# Altium PCB 心形流水灯.PcbDoc
Units mm, origin at the board's own origin, x right, y up, seen from the top; angles counter-clockwise.
Board outline 85 x 75 mm, 2 copper layers (Top Layer, Bottom Layer); 72 components, 70 nets, 187 pads, 0 vias.
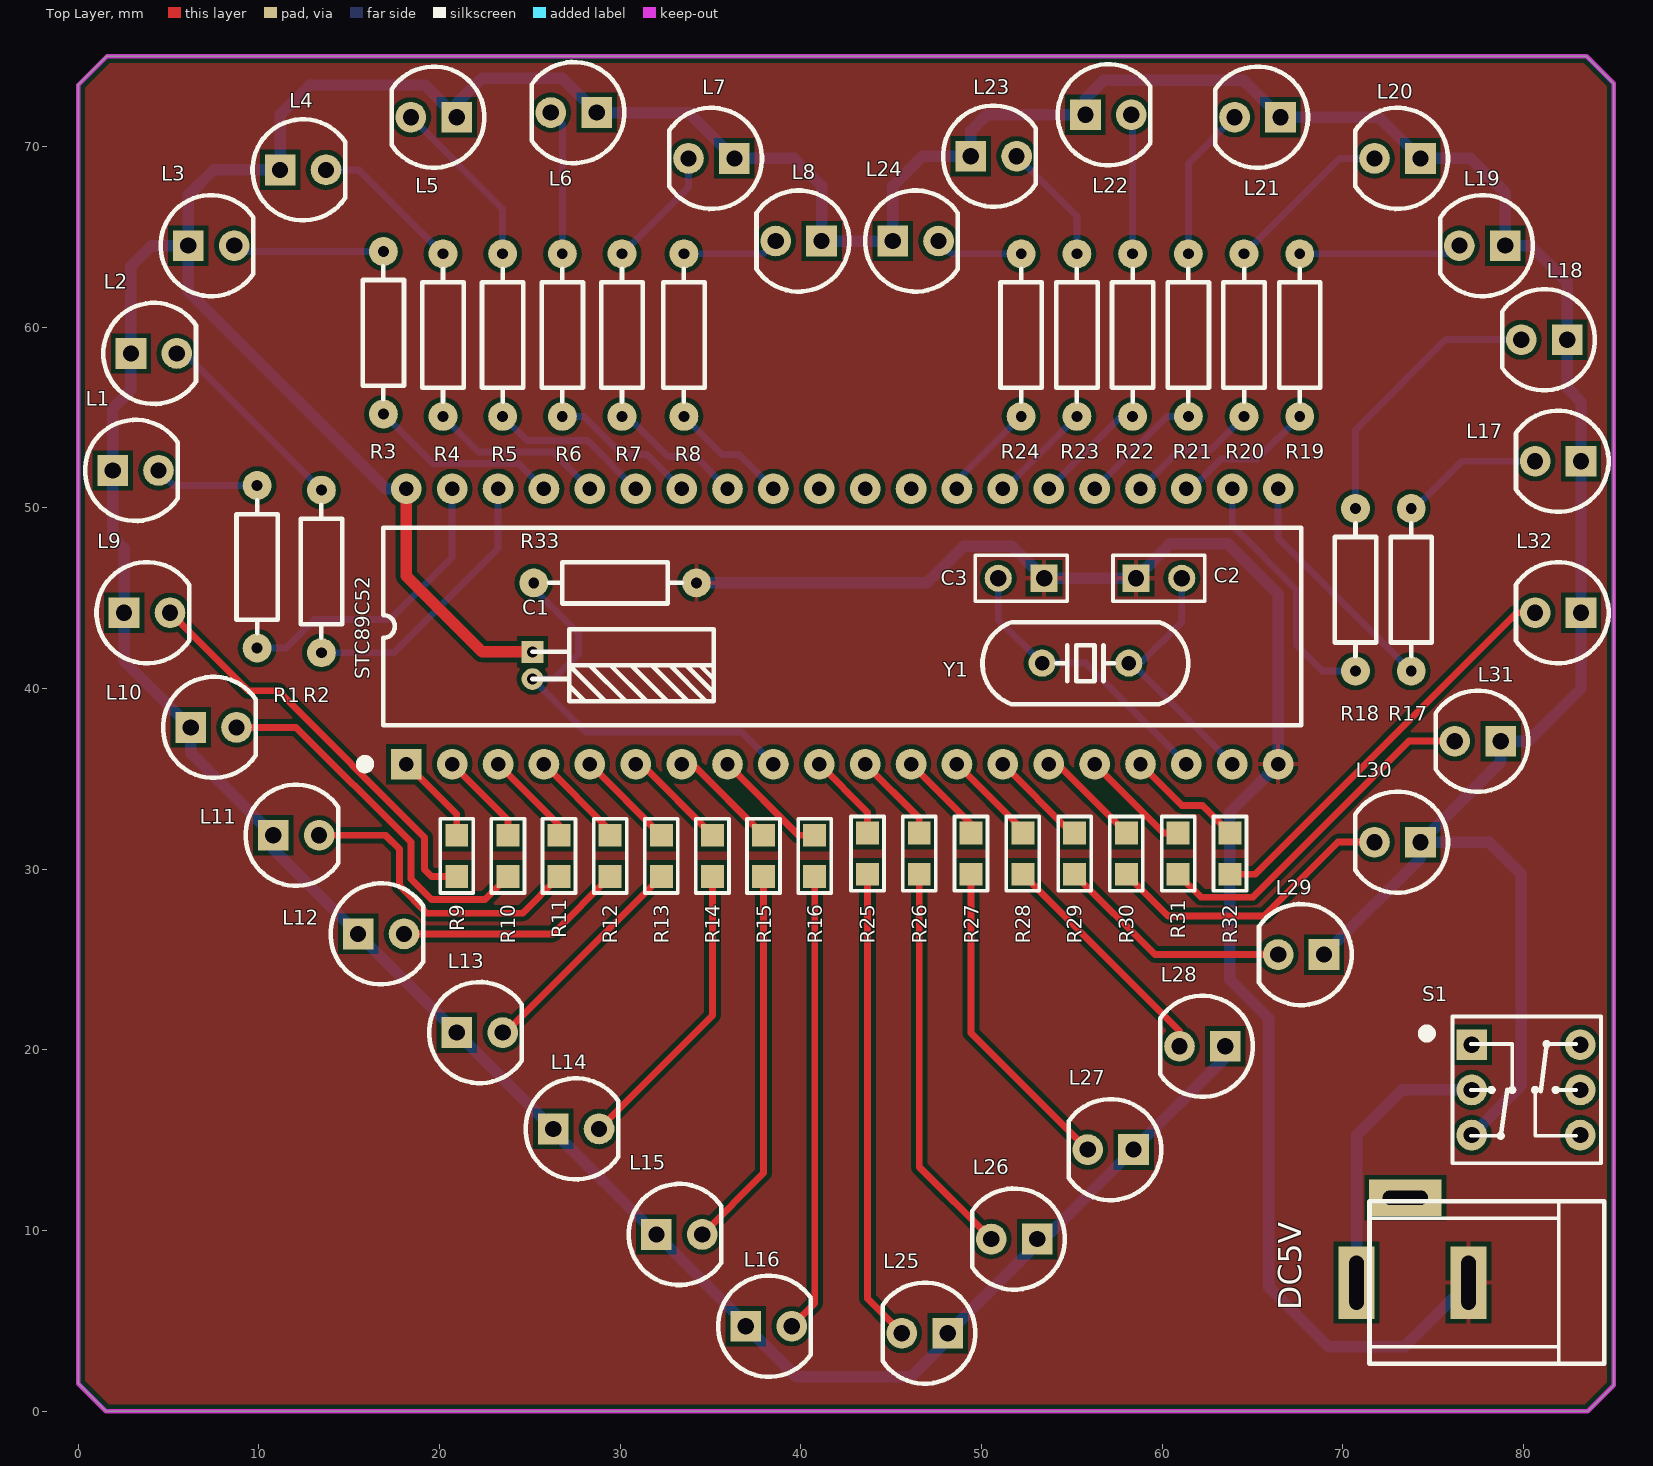
[diagram p0: Top Layer view]
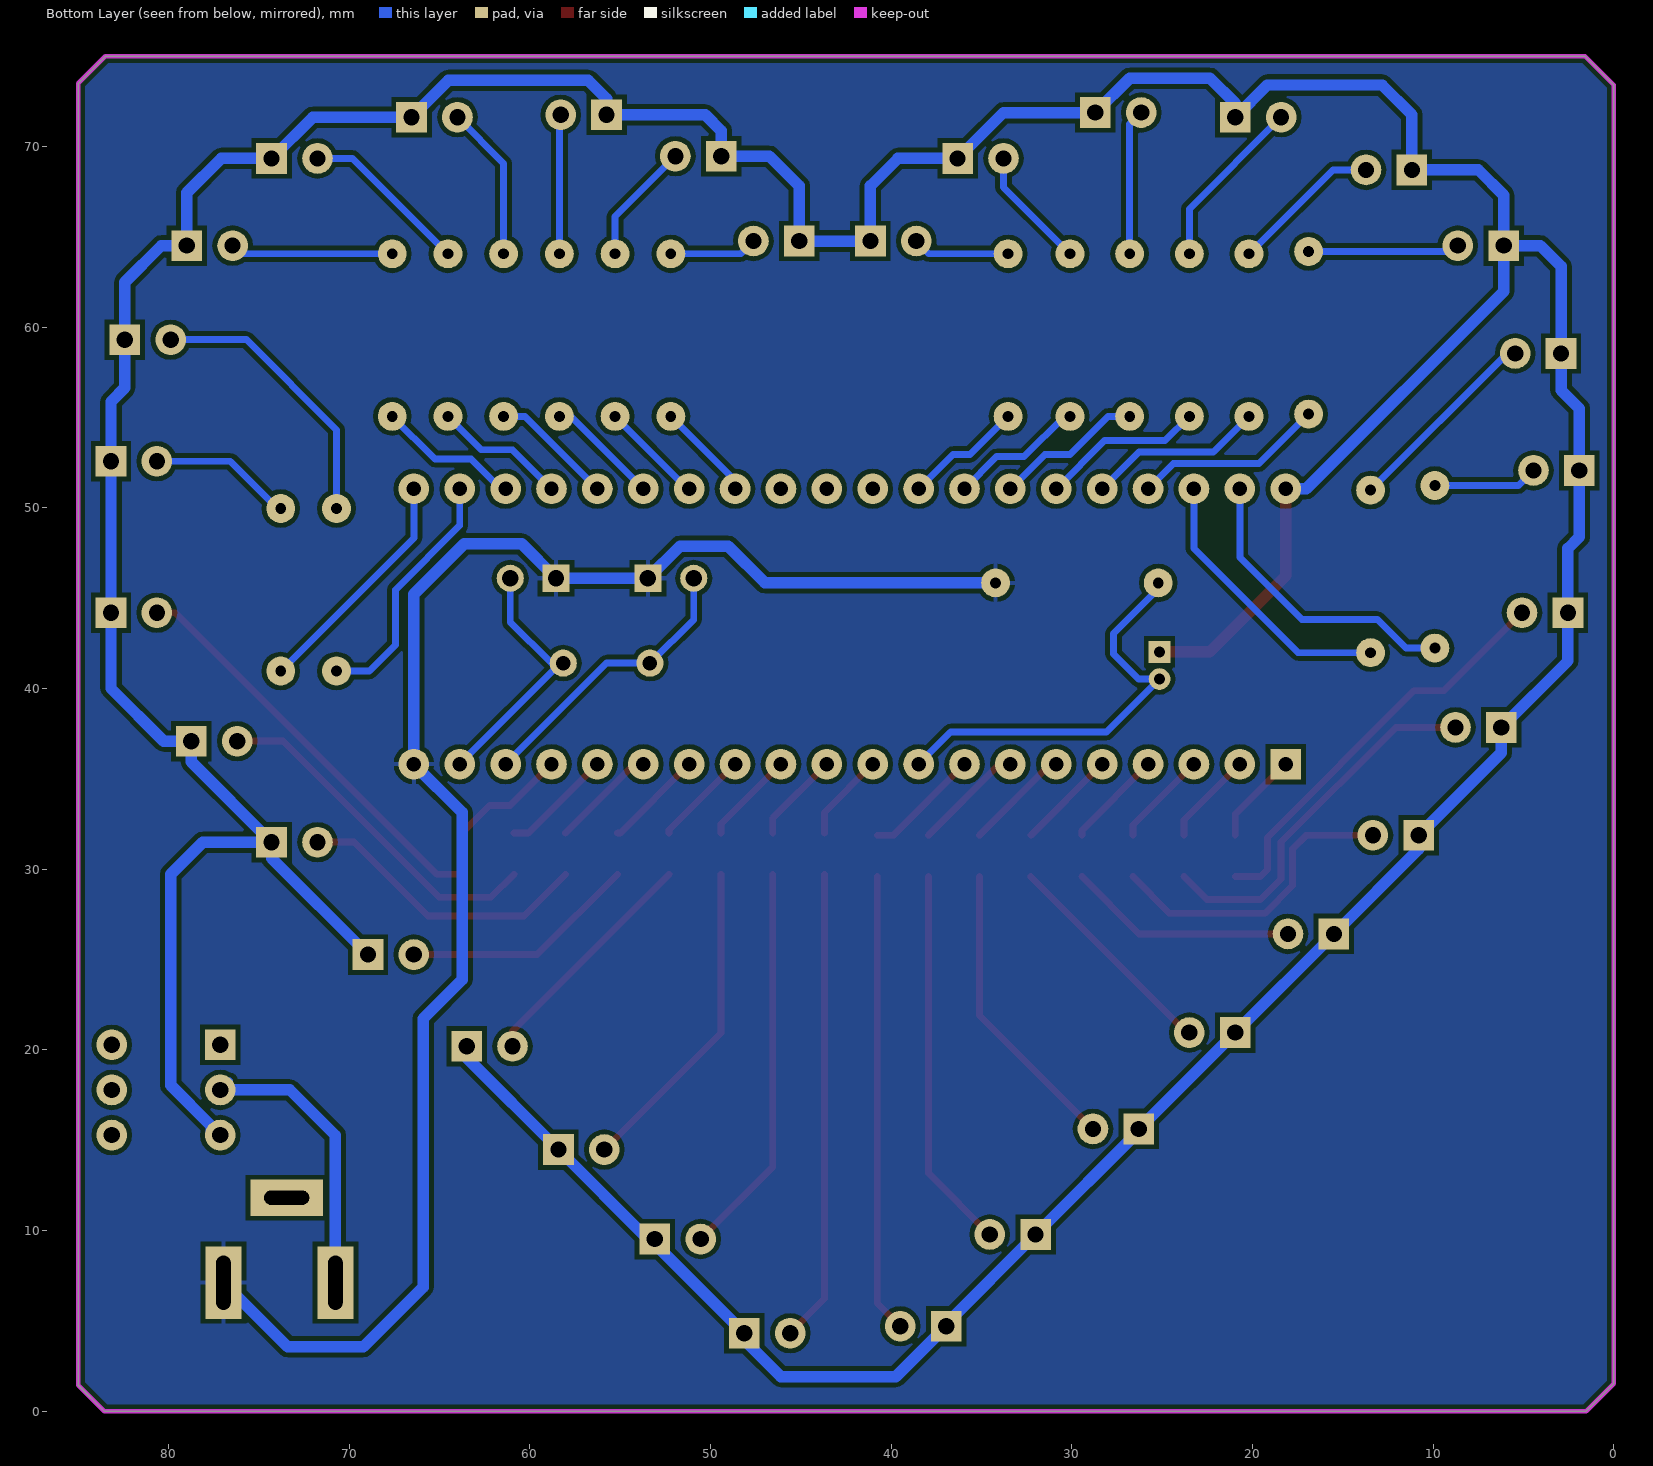
[diagram p1: Bottom Layer view, seen from below]
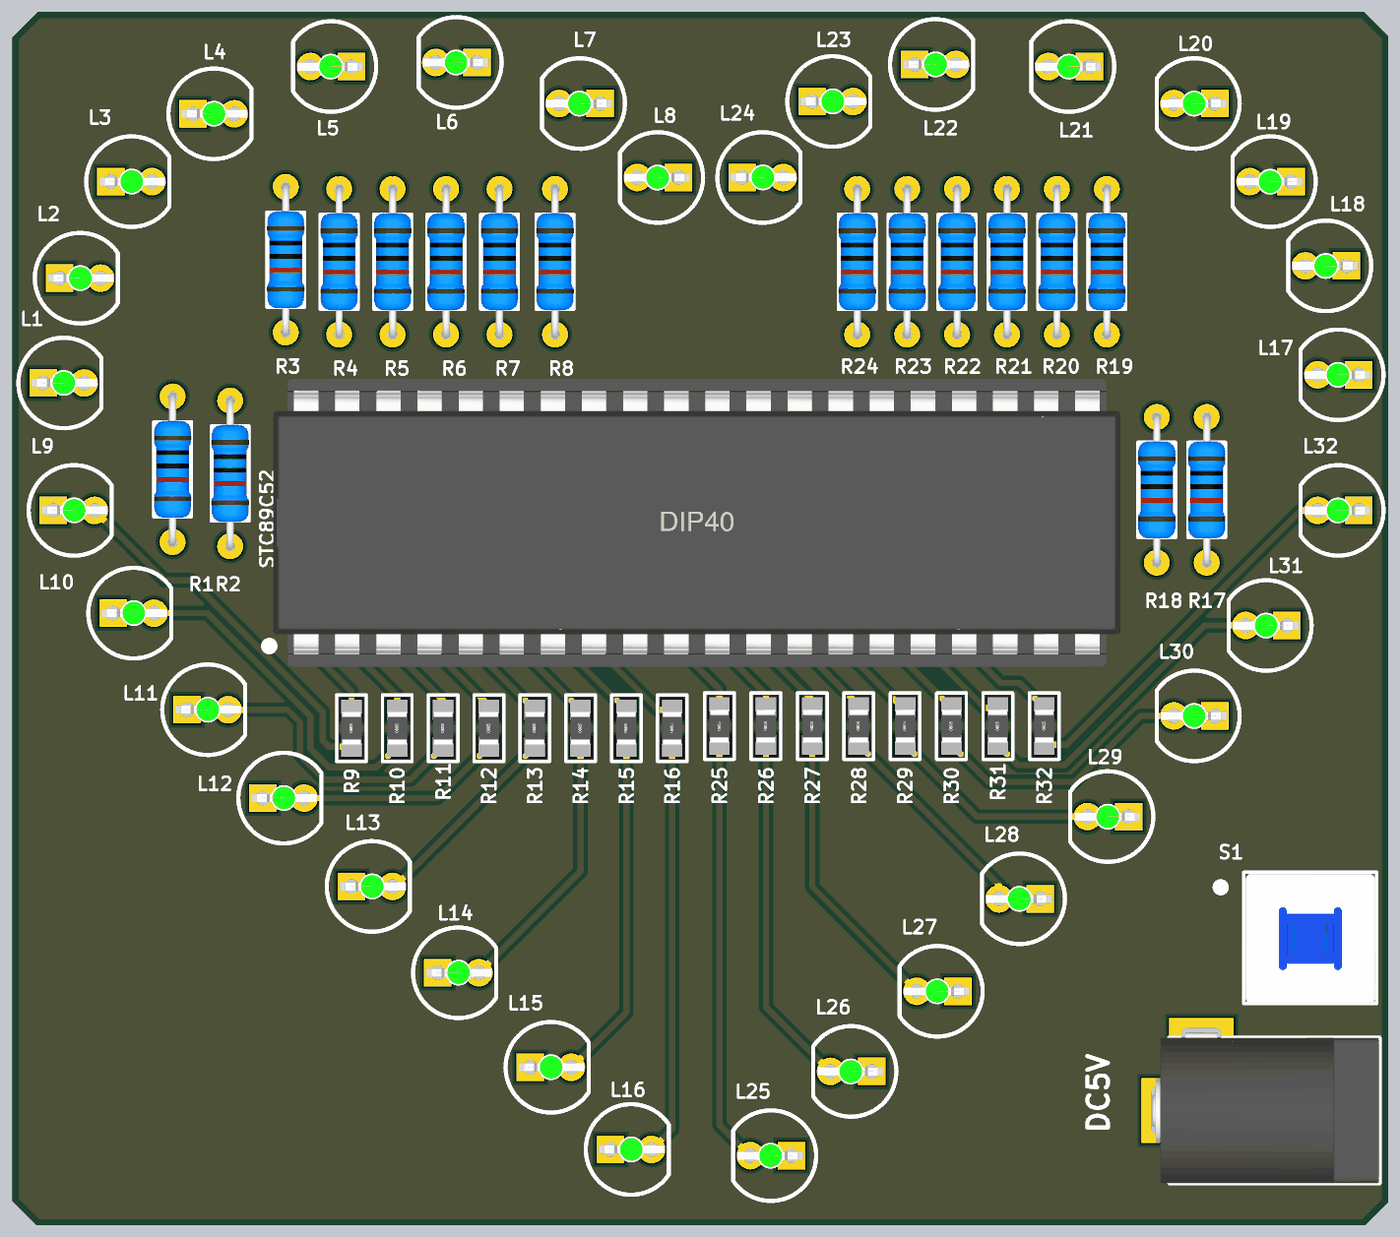
[diagram p2: 3D render of the assembled board from above, using the file's embedded part models]

## Layer stack, top to bottom
Top Solder: solder mask 0.0102, Solder Resist, Dk 3.5
Top Layer: signal copper 0.0356
Dielectric1: dielectric 0.32, FR-4, Dk 4.8
Bottom Layer: signal copper 0.0356
Bottom Solder: solder mask 0.0102, Solder Resist, Dk 3.5

## Board outline
1.524,0 0,1.524 0,73.406 1.594,75 83.496,75 85,73.496 85,1.434 83.566,0

## Design rules (kind name [scope] priority, off if disabled: settings)
Clearance [All] p1: gap=0.254 ignorepadtopadclearanceinfootprint=FALSE except(0: Arc-Hole Track-Hole SMDPad-Hole THPad-Hole Via-Hole Fill-Hole Poly-Hole Region-Hole Text-Hole)
PolygonConnect [All] p1: connectstyle=Relief reliefconductorwidth=0.254 reliefentries=4 polygonreliefangle="90 Angle" airgapwidth=0.254
RoutingVias [All] p1: holewidth=0.711 width=1.27 viastyle="Through Hole" minholewidth=0.711 minwidth=1.27 maxholewidth=0.711 maxwidth=1.27
SilkToSilkClearance [All] p1: silktosilkclearance=0
SilkToSolderMaskClearance SilkscreenOverComponentPads [IsPad] p1: minsilkscreentomaskgap=0 clearancetoexposedcopper=TRUE
SolderMaskExpansion [All] p1: expansion=0.102 istentingtop=FALSE
Width Width_1 [InNetClass('New Class')] p1: maxlimit=0.762 minlimit=0.254 preferedwidth=0.635
Width [All] p2: maxlimit=2.54 minlimit=0.254 preferedwidth=0.381 minimp=50.000000 maximp=50.000000 favimp=50.000000
28 further rules are at their usual default settings.

## Classes and differential pairs
net class "New Class": GND NetDC_1 VCC

## Components (designator, comment, footprint, x,y, rotation, side; value= is the part's Value field where it differs from the comment)
C1 "Cap Pol1" "CAP 1.5*4*8-H" 25.146,41.275 r270 top
C2 "Cap" HDR1X2 58.547,46.101 r0 top
C3 "Cap" HDR1X2 53.467,46.101 r180 top
DC5V "Header 3" DC-005 76.962,7.112 r0 top (schematic designator DC)
L1 "LED" "LED 5MM-G" 3.175,52.07 r0 top
L2 "LED" "LED 5MM-G" 4.191,58.547 r0 top
L3 "LED" "LED 5MM-G" 7.366,64.516 r0 top
L4 "LED" "LED 5MM-G" 12.446,68.707 r0 top
L5 "LED" "LED 5MM-G" 19.685,71.628 r180 top
L6 "LED" "LED 5MM-G" 27.432,71.882 r180 top
L7 "LED" "LED 5MM-G" 35.052,69.342 r180 top
L8 "LED" "LED 5MM-G" 39.878,64.77 r180 top
L9 "LED" "LED 5MM-G" 3.81,44.196 r0 top
L10 "LED" "LED 5MM-G" 7.493,37.846 r0 top
L11 "LED" "LED 5MM-G" 12.065,31.877 r0 top
L12 "LED" "LED 5MM-G" 16.764,26.416 r0 top
L13 "LED" "LED 5MM-G" 22.225,20.955 r0 top
L14 "LED" "LED 5MM-G" 27.559,15.621 r0 top
L15 "LED" "LED 5MM-G" 33.274,9.779 r0 top
L16 "LED" "LED 5MM-G" 38.227,4.699 r0 top
L17 "LED" "LED 5MM-G" 81.915,52.578 r180 top
L18 "LED" "LED 5MM-G" 81.153,59.309 r180 top
L19 "LED" "LED 5MM-G" 77.724,64.516 r180 top
L20 "LED" "LED 5MM-G" 73.025,69.342 r180 top
L21 "LED" "LED 5MM-G" 65.278,71.628 r180 top
L22 "LED" "LED 5MM-G" 57.023,71.755 r0 top
L23 "LED" "LED 5MM-G" 50.673,69.469 r0 top
L24 "LED" "LED 5MM-G" 46.355,64.77 r0 top
L25 "LED" "LED 5MM-G" 46.863,4.318 r180 top
L26 "LED" "LED 5MM-G" 51.816,9.525 r180 top
L27 "LED" "LED 5MM-G" 57.15,14.478 r180 top
L28 "LED" "LED 5MM-G" 62.23,20.193 r180 top
L29 "LED" "LED 5MM-G" 67.691,25.273 r180 top
L30 "LED" "LED 5MM-G" 73.025,31.496 r180 top
L31 "LED" "LED 5MM-G" 77.47,37.084 r180 top
L32 "LED" "LED 5MM-G" 81.915,44.196 r180 top
R1 "Res2" "RS 1/4W" 9.906,46.736 r270 top
R2 "Res2" "RS 1/4W" 13.462,46.482 r270 top
R3 "Res2" "RS 1/4W" 16.891,59.69 r270 top
R4 "Res2" "RS 1/4W" 20.193,59.563 r270 top
R5 "Res2" "RS 1/4W" 23.495,59.563 r270 top
R6 "Res2" "RS 1/4W" 26.797,59.563 r270 top
R7 "Res2" "RS 1/4W" 30.099,59.563 r270 top
R8 "Res2" "RS 1/4W" 33.528,59.563 r270 top
R9 "Res2" "R 0805" 20.955,30.734 r90 top
R10 "Res2" "R 0805" 23.785,30.734 r90 top
R11 "Res2" "R 0805" 26.616,30.734 r90 top
R12 "Res2" "R 0805" 29.446,30.734 r90 top
R13 "Res2" "R 0805" 32.276,30.734 r90 top
R14 "Res2" "R 0805" 35.106,30.734 r90 top
R15 "Res2" "R 0805" 37.937,30.734 r90 top
R16 "Res2" "R 0805" 40.767,30.734 r90 top
R17 "Res2" "RS 1/4W" 73.787,45.466 r270 top
R18 "Res2" "RS 1/4W" 70.703,45.466 r270 top
R19 "Res2" "RS 1/4W" 67.618,59.563 r270 top
R20 "Res2" "RS 1/4W" 64.534,59.563 r270 top
R21 "Res2" "RS 1/4W" 61.45,59.563 r270 top
R22 "Res2" "RS 1/4W" 58.366,59.563 r270 top
R23 "Res2" "RS 1/4W" 55.281,59.563 r270 top
R24 "Res2" "RS 1/4W" 52.197,59.563 r270 top
R25 "Res2" "R 0805" 43.688,30.861 r90 top
R26 "Res2" "R 0805" 46.555,30.861 r90 top
R27 "Res2" "R 0805" 49.421,30.861 r90 top
R28 "Res2" "R 0805" 52.288,30.861 r90 top
R29 "Res2" "R 0805" 55.154,30.861 r90 top
R30 "Res2" "R 0805" 58.021,30.861 r90 top
R31 "Res2" "R 0805" 60.887,30.861 r90 top
R32 "Res2" "R 0805" 63.754,30.861 r90 top
R33 "Res2" "RS 1/4W" 29.718,45.847 r180 top
S1 "SW-DPDT" "KFT DIP-8X8" 80.137,17.78 r0 top
STC89C52 "STC89C52RC" DIP40-600_MH 42.291,43.434 r90 top (schematic designator MCU)
Y1 "XTAL" "XTAL-49S DIP" 55.753,41.402 r0 top

## Footprints (in the part's own frame and the unit in brackets; to place one, negate y for a bottom-side part, rotate by r counter-clockwise, add the part's x,y. Pads: shape width x height; smd on the part's side, far side on the other; paste and mask are expansions set on the pad)
"CAP 1.5*4*8-H" [mm] "脚距1.5mm直径4mm高度8mm"
  rect 1.2x1.2 hole 0.6: 1(-0.75,0)
  round 1.2 hole 0.6: 2(0.75,0)
  silkscreen extent -2.01,0 1.99,10.03, body extent -2,-0.25 2.02,10, height 4.02
DC-005 [mm] "5.5*2.1mm，DC30V,2.5A"
  rect 2x4 hole 0.8 slot 3 at 90 deg: 1(-6.2,0) 2(0,0)
  rect 4x2 hole 0.8 slot 2.5 at 0 deg: 3(-3.5,4.7)
  silkscreen extent -5.48,-4.5 7.5,4.5, body extent -6.55,-4.5 7.5,4.8, height 11.2
DIP40-600_MH [mm] "带底座 52*15.2*4mm(长宽高)"
  rect 1.7x1.7 hole 0.8: 1(-7.62,24.13)
  round 1.7 hole 0.8: 2(-7.62,21.59) 3(-7.62,19.05) 4(-7.62,16.51) 5(-7.62,13.97) 6(-7.62,11.43) 7(-7.62,8.89) 8(-7.62,6.35) 9(-7.62,3.81) 10(-7.62,1.27) 11(-7.62,-1.27) 12(-7.62,-3.81) 13(-7.62,-6.35) 14(-7.62,-8.89) 15(-7.62,-11.43) 16(-7.62,-13.97) 17(-7.62,-16.51) 18(-7.62,-19.05) 19(-7.62,-21.59) 20(-7.62,-24.13) 21(7.62,-24.13) 22(7.62,-21.59) 23(7.62,-19.05) 24(7.62,-16.51) 25(7.62,-13.97) 26(7.62,-11.43) 27(7.62,-8.89) 28(7.62,-6.35) 29(7.62,-3.81) 30(7.62,-1.27) 31(7.62,1.27) 32(7.62,3.81) 33(7.62,6.35) 34(7.62,8.89) 35(7.62,11.43) 36(7.62,13.97) 37(7.62,16.51) 38(7.62,19.05) 39(7.62,21.59) 40(7.62,24.13)
  silkscreen extent -7.87,-25.4 5.46,26.67, body extent -8.9,-26.18 8.9,26.18, height 8.3
HDR1X2 [mm] "Connector; Header; 2 Position"
  rect 1.5x1.5 hole 0.9: 1(0,0)
  round 1.5 hole 0.9: 2(2.54,0)
  silkscreen extent -1.27,-1.27 3.81,1.27
"KFT DIP-8X8" [mm] "自锁开关，规格：8*8mm"
  rect 1.7x1.7 hole 0.9: 1(-3,2.5)
  round 1.7 hole 0.9: 2(-3,0) 3(-3,-2.5) 4(3,-2.5) 5(3,0) 6(3,2.5)
  silkscreen extent -5.69,-4.06 4.15,4.06, body extent -3.95,-4.05 4.05,3.95, height 13.1
"LED 5MM-G" [mm] "绿色5mm直插LED"
  rect 1.7x1.7 hole 0.9: 1(-1.27,0)
  round 1.7 hole 0.9: 2(1.27,0)
  silkscreen extent -2.8,-2.8 2.33,2.8, body extent -2.85,-2.85 2.45,2.85, height 8.75
"R 0805" [mil] "1/8W贴片电阻"
  rect 50x50 smd: 1(-45,0) 2(45,0)
  silkscreen extent -81,-36 81,36, body extent -39,-25 39,25, height 20
"RS 1/4W" [mm] "直插色环电阻，脚距9mm，直径2.3mm"
  round 1.6 hole 0.6: 1(-4.5,0) 2(4.5,0)
  silkscreen extent -3.68,-1.14 3.68,1.14, body extent -4.72,-1.16 4.73,1.16, height 2.32
"XTAL-49S DIP" [mm]
  round 1.5 hole 0.8: 1(-2.4,0) 2(2.4,0)
  silkscreen extent -5.7,-2.28 5.7,2.28, body extent -5.68,-2.35 5.67,2.3, height 3.5

## Part data
C1: "Polarized Capacitor (Radial)"
C2 C3: "Capacitor"
DC5V: "Header, 3-Pin"
L1 L2 L3 L4 L5 L6 L7 L8 L9 L10 L11 L12 L13 L14 L15 L16 L17 L18 L19 L20 L21 L22 L23 L24 L25 L26 L27 L28 L29 L30 L31 L32: library part LED_T
R1 R2 R3 R4 R5 R6 R7 R8 R9 R10 R11 R12 R13 R14 R15 R16 R17 R18 R19 R20 R21 R22 R23 R24 R25 R26 R27 R28 R29 R30 R31 R32 R33: "Resistor"
S1: "Double-Pole, Double-Throw Switch"
STC89C52: "STC单片机"
Y1: "Crystal Oscillator"

## Nets (pads, with @x,y where several pads share a name; then routed paths per layer and width w, separated by ;. In a path a pad name is that pad's centre, name@x,y a point inside that pad or via, vN(x,y) a via of type N, cw(c..) or ccw(c..) an arc to the next point about the centre after c; other vN are vias at no path point)
GND: C2.1 C3.1 DC5V.2 R33.1 STC89C52.20 | length 90
  Bottom Layer w0.635: R33.1 46.99,45.847 49.022,47.879 51.689,47.879 C3.1 C2.1 60.452,48.006 63.627,48.006 66.421,45.212 STC89C52.20 63.754,33.147 63.754,23.876 65.913,21.717 65.913,6.858 69.215,3.556 73.406,3.556 DC5V.2
NetDC_1: DC5V.1 S1.2 | length 16.3
  Bottom Layer w0.381: S1.2@76.629,18.288 S1.2
  Bottom Layer w0.635: DC5V.1 70.762,15.263 73.279,17.78 S1.2
NetL1_2: L1.2 R1.1 | length 5.8
  Bottom Layer w0.381: L1.2 5.279,51.236 R1.1
NetL2_2: L2.2 R2.1 | length 11.1
  Bottom Layer w0.381: L2.2 5.897,58.547 R2.1
NetL3_2: L3.2 R3.1 | length 8.4
  Bottom Layer w0.381: L3.2 8.962,64.19 R3.1
NetL4_2: L4.2 R4.1 | length 8.4
  Bottom Layer w0.381: L4.2 15.549,68.707 R4.1
NetL5_2: L5.2 R5.1 | length 9.7
  Bottom Layer w0.381: L5.2 23.495,66.548 R5.1
NetL6_2: L6.2 R6.1 | length 8.1
  Bottom Layer w0.381: L6.2 26.797,71.247 R6.1
NetL7_2: L7.2 R7.1 | length 6.8
  Bottom Layer w0.381: R7.1 33.782,67.746 L7.2
NetL8_2: L8.2 R8.1 | length 5.4
  Bottom Layer w0.381: R8.1 37.901,64.063 L8.2
NetL9_2: L9.2 R9.1 | length 23
  Top Layer w0.381: L9.2 9.398,39.878 11.049,39.878 19.177,31.75 19.177,29.972 19.558,29.591 R9.1
NetL10_2: L10.2 R10.1 | length 20.7
  Top Layer w0.381: L10.2 12.065,37.846 18.415,31.496 18.415,29.464 19.558,28.321 22.515,28.321 R10.1
NetL11_2: L11.2 R11.1 | length 17.1
  Top Layer w0.381: L11.2 17.018,31.877 17.78,31.115 17.78,29.083 19.304,27.559 24.584,27.559 R11.1
NetL12_2: L12.2 R12.1 | length 12.7
  Top Layer w0.381: L12.2 26.271,26.416 R12.1
NetL13_2: L13.2 R13.1 | length 12.4
  Top Layer w0.381: L13.2 23.64,20.955 R13.1
NetL14_2: L14.2 R14.1 | length 16.6
  Top Layer w0.381: L14.2 35.106,21.898 R14.1
NetL15_2: L15.2 R15.1 | length 21.2
  Top Layer w0.381: L15.2 37.937,13.172 R15.1
NetL16_2: L16.2 R16.1 | length 25.4
  Top Layer w0.381: L16.2 40.767,5.969 R16.1
NetL17_2: L17.2 R17.1 | length 7.9
  Bottom Layer w0.381: R17.1 73.969,49.966 76.581,52.578 L17.2
NetL18_2: L18.2 R18.1 | length 15.6
  Bottom Layer w0.381: R18.1 70.703,54.32 75.692,59.309 L18.2
NetL19_2: L19.2 R19.1 | length 9
  Bottom Layer w0.381: R19.1 76.001,64.063 L19.2
NetL20_2: L20.2 R20.1 | length 9.4
  Bottom Layer w0.381: R20.1 69.813,69.342 L20.2
NetL21_2: L21.2 R21.1 | length 8.6
  Bottom Layer w0.381: R21.1 61.45,69.07 L21.2
NetL22_2: L22.2 R22.1 | length 7.7
  Bottom Layer w0.381: L22.2 58.366,71.682 R22.1
NetL23_2: L23.2 R23.1 | length 6.8
  Bottom Layer w0.381: L23.2 55.281,66.131 R23.1
NetL24_2: L24.2 R24.1 | length 4.9
  Bottom Layer w0.381: L24.2 48.332,64.063 R24.1
NetL25_2: L25.2 R25.1 | length 26.2
  Top Layer w0.381: R25.1 43.688,6.223 L25.2
NetL26_2: L26.2 R26.1 | length 21.8
  Top Layer w0.381: R26.1 46.555,13.516 L26.2
NetL27_2: L27.2 R27.1 | length 17.9
  Top Layer w0.381: R27.1 49.421,20.937 L27.2
NetL28_2: L28.2 R28.1 | length 13.1
  Top Layer w0.381: R28.1 60.96,21.046 L28.2
NetL29_2: L29.2 R29.1 | length 13.1
  Top Layer w0.381: R29.1 59.599,25.273 L29.2
NetL30_2: L30.2 R30.1 | length 16.4
  Top Layer w0.381: R30.1 60.325,27.414 65.641,27.414 69.723,31.496 L30.2
NetL31_2: L31.2 R31.1 | length 19.4
  Top Layer w0.381: R31.1 62.157,28.448 65.024,28.448 73.66,37.084 L31.2
NetL32_2: L32.2 R32.1 | length 22.9
  Top Layer w0.381: R32.1 65.151,29.718 79.629,44.196 L32.2
P00: R1.2 STC89C52.39 | length 16.7
  Bottom Layer w0.381: R1.2 11.502,42.236 13.081,43.815 17.272,43.815 20.701,47.244 STC89C52.39
P01: R2.2 STC89C52.38 | length 15.5
  Bottom Layer w0.381: R2.2 17.471,41.982 23.241,47.752 STC89C52.38
P02: R3.2 STC89C52.37 | length 10.6
  Bottom Layer w0.381: R3.2 19.63,52.451 24.384,52.451 STC89C52.37
P03: R4.2 STC89C52.36 | length 9.8
  Bottom Layer w0.381: R4.2 22.17,53.086 26.289,53.086 STC89C52.36
P04: R5.2 STC89C52.35 | length 9
  Bottom Layer w0.381: R5.2 24.837,53.721 28.194,53.721 STC89C52.35
P05: R6.2 STC89C52.34 | length 8.3
  Bottom Layer w0.381: R6.2 27.995,55.063 30.099,52.959 31.496,52.959 STC89C52.34
P06: R7.2 STC89C52.33 | length 7.5
  Bottom Layer w0.381: R7.2 30.408,55.063 32.639,52.832 34.163,52.832 STC89C52.33
P07: R8.2 STC89C52.32 | length 6.6
  Bottom Layer w0.381: R8.2 35.632,52.959 36.576,52.959 STC89C52.32
P10: R9.2 STC89C52.1 | length 5.1
  Top Layer w0.381: STC89C52.1 20.955,33.02 R9.2
P11: R10.2 STC89C52.2 | length 5.2
  Top Layer w0.381: STC89C52.2 23.785,32.73 R10.2
P12: R11.2 STC89C52.3 | length 5.3
  Top Layer w0.381: STC89C52.3 26.616,32.439 R11.2
P13: R12.2 STC89C52.4 | length 5.5
  Top Layer w0.381: STC89C52.4 29.446,32.149 R12.2
P14: R13.2 STC89C52.5 | length 5.6
  Top Layer w0.381: STC89C52.5 32.258,31.877 R13.2
P15: R14.2 STC89C52.6 | length 5.9
  Top Layer w0.381: STC89C52.6 31.169,35.814 R14.2
P16: R15.2 STC89C52.7 | length 6.2
  Top Layer w0.381: STC89C52.7 34,35.814 R15.2
P17: R16.2 STC89C52.8 | length 6.5
  Top Layer w0.381: STC89C52.8 39.878,31.877 R16.2
P20: R17.2 STC89C52.21 | length 13.1
  Bottom Layer w0.381: STC89C52.21 66.421,48.332 R17.2
P21: R18.2 STC89C52.22 | length 14
  Bottom Layer w0.381: STC89C52.22 63.881,49.022 67.437,45.466 67.437,42.418 68.889,40.966 R18.2
P22: R19.2 STC89C52.23 | length 7.9
  Bottom Layer w0.381: STC89C52.23 61.595,51.054 63.246,52.705 65.26,52.705 R19.2
P23: R20.2 STC89C52.24 | length 7.4
  Bottom Layer w0.381: STC89C52.24 60.96,53.213 62.684,53.213 R20.2
P24: R21.2 STC89C52.25 | length 6.8
  Bottom Layer w0.381: STC89C52.25 60.27,55.063 R21.2
P25: R22.2 STC89C52.26 | length 6.3
  Bottom Layer w0.381: STC89C52.26 57.73,55.063 R22.2
P26: R23.2 STC89C52.27 | length 5.8
  Bottom Layer w0.381: STC89C52.27 51.272,51.054 R23.2
P27: R24.2 STC89C52.28 | length 5.5
  Bottom Layer w0.381: STC89C52.28 48.641,51.507 R24.2
P30: R25.2 STC89C52.10 | length 4.9
  Top Layer w0.381: STC89C52.10 43.688,33.147 R25.2
P31: R26.2 STC89C52.11 | length 5
  Top Layer w0.381: STC89C52.11 46.555,32.82 R26.2
P32: R27.2 STC89C52.12 | length 5.2
  Top Layer w0.381: STC89C52.12 49.421,32.494 R27.2
P33: R28.2 STC89C52.13 | length 5.3
  Top Layer w0.381: STC89C52.13 52.288,32.167 R28.2
P34: R29.2 STC89C52.14 | length 5.6
  Top Layer w0.381: STC89C52.14 54.991,32.004 R29.2
P35: R30.2 STC89C52.15 | length 5.9
  Top Layer w0.381: STC89C52.15 54.211,35.814 R30.2
P36: R31.2 STC89C52.16 | length 6.2
  Top Layer w0.381: STC89C52.16 60.071,32.004 R31.2
P37: R32.2 STC89C52.17 | length 6.5
  Top Layer w0.381: STC89C52.17 61.087,33.528 62.23,33.528 R32.2
RES: C1.2 R33.2 STC89C52.9 | length 23.4
  Bottom Layer w0.381: R33.2 25.218,45.521 27.686,43.053 27.686,41.91 26.301,40.525 C1.2 28.079,37.592 36.703,37.592 STC89C52.9
VCC: C1.1 L1.1 L2.1 L3.1 L4.1 L5.1 L6.1 L7.1 L8.1 L9.1 L10.1 L11.1 L12.1 L13.1 L14.1 L15.1 L16.1 L17.1 L18.1 L19.1 L20.1 L21.1 L22.1 L23.1 L24.1 L25.1 L26.1 L27.1 L28.1 L29.1 L30.1 L31.1 L32.1 S1.3 STC89C52.40 | length 317
  Top Layer w0.635: STC89C52.40 18.161,46.228 22.364,42.025 C1.1
  Bottom Layer w0.635: STC89C52.40 17.018,51.054 6.096,61.976 L3.1 ; L28.1@63.881,20.193 L28.1 63.5,19.558 L27.1 53.467,9.525 L26.1 53.086,9.271 L25.1 48.133,3.937 46.101,1.905 39.751,1.905 L16.1 36.957,4.826 L15.1 26.289,15.494 L14.1 L13.1 L12.1 10.795,31.115 L11.1 6.223,36.449 L10.1 2.54,41.529 L9.1 2.54,47.752 1.905,48.387 L1.1 1.905,55.499 2.921,56.515 L2.1 2.921,63.373 4.064,64.516 L3.1 ; L29.1 74.295,30.607 L30.1 ; S1.3 77.637,15.28 77.637,15.788 79.883,18.034 79.883,29.718 78.105,31.496 L30.1 ; L3.1 6.096,67.31 7.493,68.707 L4.1 11.176,71.755 12.827,73.406 19.177,73.406 L5.1 20.955,72.39 22.352,73.787 26.797,73.787 L6.1 33.782,71.882 L7.1 39.624,69.342 41.148,67.818 L8.1 L24.1 45.085,67.818 46.736,69.469 L23.1 49.403,70.866 50.292,71.755 L22.1 55.753,72.644 56.769,73.66 64.516,73.66 L21.1 72.009,71.628 L20.1 77.089,69.342 78.994,67.437 L19.1 80.391,64.516 82.423,62.484 L18.1 82.423,56.642 83.185,55.88 L17.1 L32.1 83.185,40.005 80.264,37.084 L31.1 78.74,35.941 L30.1
X1: C2.2 STC89C52.19 Y1.2 | length 14.2
  Bottom Layer w0.381: Y1.2 Y1.2@58.293,41.402 ; C2.2 61.087,43.688 58.801,41.402 Y1.2@58.293,41.402 ; STC89C52.19 Y1.2@58.293,41.402
X2: C3.2 STC89C52.18 Y1.1 | length 16
  Bottom Layer w0.381: C3.2 50.927,43.828 Y1.1 55.753,41.402 STC89C52.18
pads on no net: DC5V.3 S1.1 S1.4 S1.5 S1.6 STC89C52.29 STC89C52.30 STC89C52.31

## Polygon pours and split planes (outlines as drawn)
GND on Top Layer "Top Layer-No Net" (solid, remove dead copper, pour order 6): -2.286,76.708 -2.286,2.794 4.318,-3.81 4.699,-4.191 87.884,-4.191 87.884,74.803 84.074,78.613
GND on Bottom Layer "Top Layer-No Net" (solid, remove dead copper, pour order 8): -2.794,78.105 -2.54,77.851 -2.54,-3.175 88.9,-3.175 89.154,-3.429 90.043,-2.54 90.043,78.359

## Keep-outs
Keep-Out Layer:
  the board outline again, w0.25